# Altium PCB UU-PCBA-MANT-CON-AA.PcbDoc
Units mm, origin at the board's own origin, x right, y up, seen from the top; angles counter-clockwise.
Board outline 64 x 61 mm, 2 copper layers (Top Layer, Bottom Layer), stack 3.118 mm thick; 2 components, 3 nets, 13 pads, 0 vias.
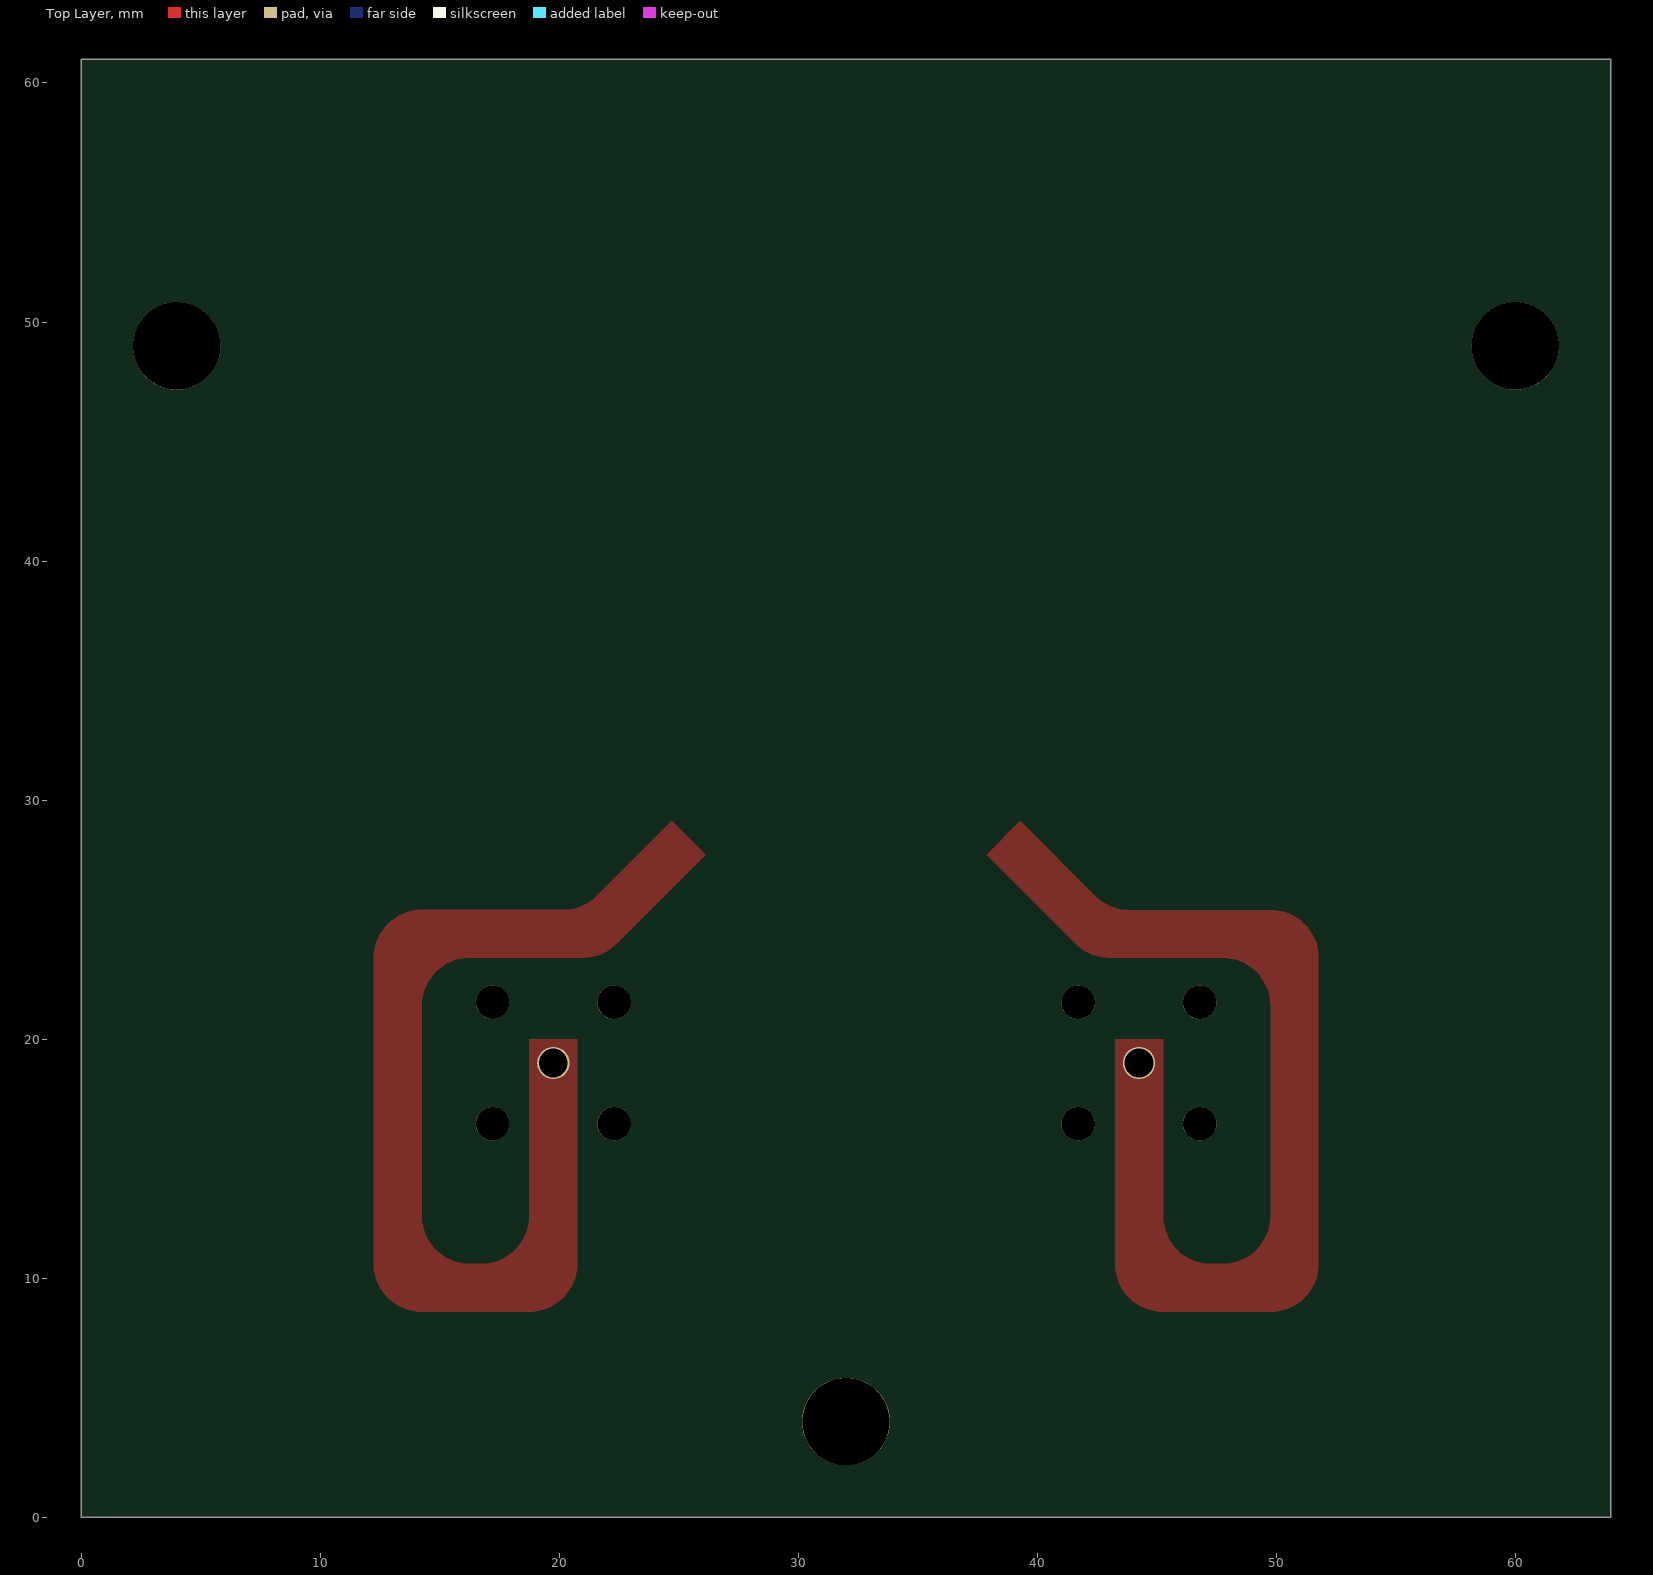
[diagram p0: Top Layer view]
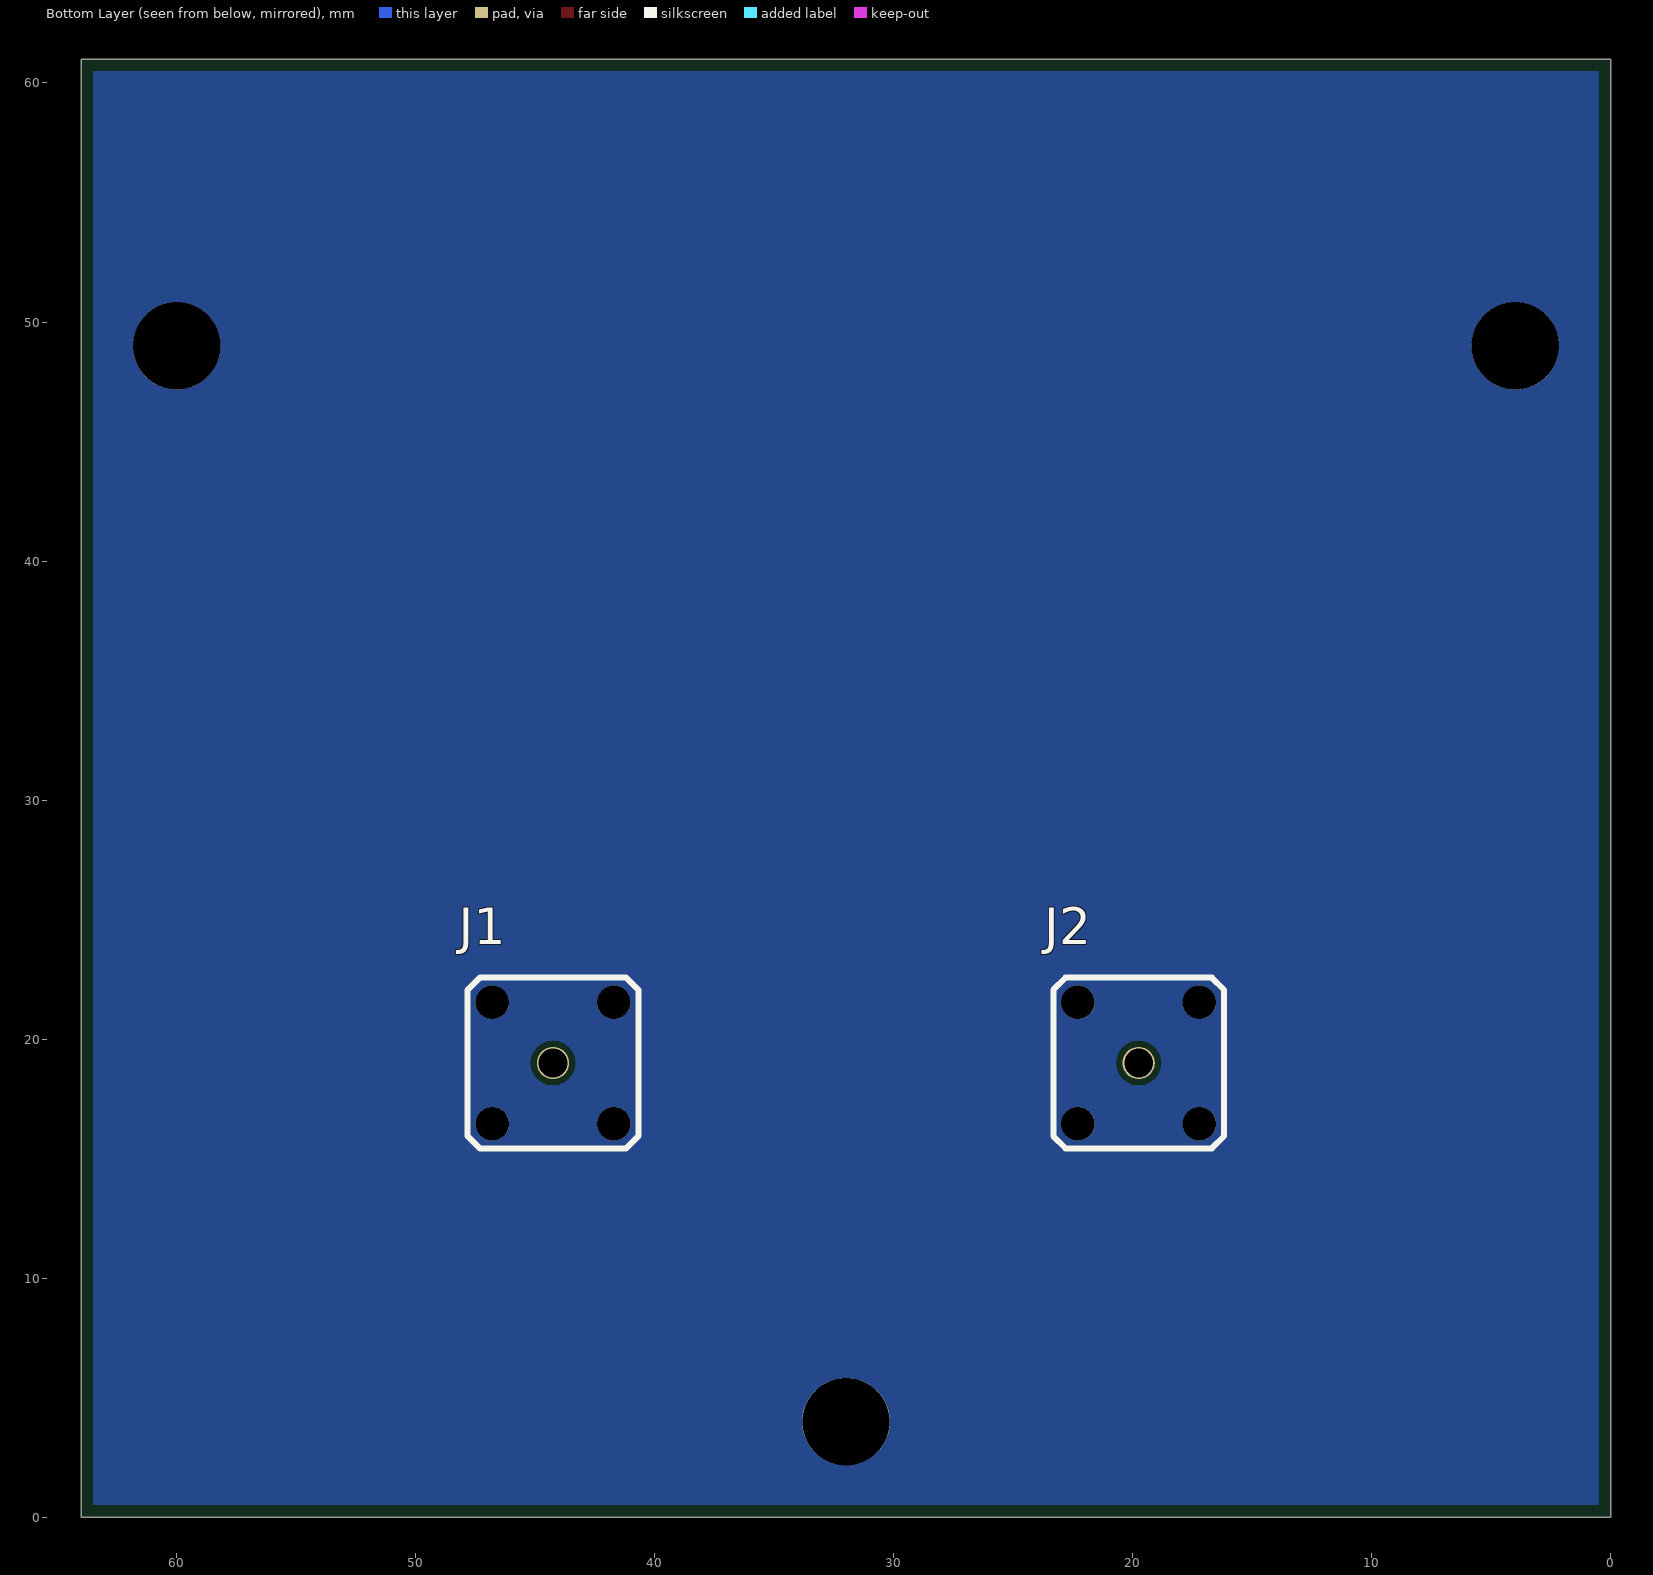
[diagram p1: Bottom Layer view, seen from below]

## Layer stack, top to bottom
Top Solder: solder mask 0.0254, Solder Resist, Dk 4
Top Layer: signal copper 0.035
Dielectric 1: core 3.048, Rogers AD300D, Dk 3
Bottom Layer: signal copper 0.035
Bottom Solder: solder mask 0.0254, Solder Resist, Dk 4

## Board outline
0,0 64,0 64,61 0,61

## Design rules (kind name [scope] priority, off if disabled: settings)
BoardOutlineClearance [All] p1: gap=0.508 ignorepadtopadclearanceinfootprint=FALSE
Clearance [All] p1: gap=0.254 ignorepadtopadclearanceinfootprint=FALSE except(0: Arc-Hole Track-Hole SMDPad-Hole THPad-Hole Via-Hole Fill-Hole Poly-Hole Region-Hole Text-Hole)
ComponentClearance [All] p1: gap=0 collisioncheckmode=3 verticalgap=0 showdistances=FALSE
PlaneConnect [All] p1: planeconnectstyle=Direct reliefexpansion=0.508 reliefentries=4 reliefconductorwidth=0.254 reliefairgap=0.254
PolygonConnect [All] p1: connectstyle=Direct reliefconductorwidth=0.4 reliefentries=4 polygonreliefangle="45 Angle" airgapwidth=0.3
RoutingVias [All] p1: holewidth=0.711 width=1.27 viastyle="Through Hole" minholewidth=0.711 minwidth=1.27 maxholewidth=0.711 maxwidth=1.27
SolderMaskExpansion [All] p1: expansion=0.102 istentingtop=FALSE
Width [All] p1: maxlimit=30 minlimit=0.01 preferedwidth=1.1 minimp=50.000000 maximp=50.000000 favimp=50.000000
28 further rules are at their usual default settings.

## Components (designator, comment, footprint, x,y, rotation, side; value= is the part's Value field where it differs from the comment)
J1 "MCX Male" RSP-199156-01 44.256,19 r180 bottom
J2 "MCX Male" RSP-199156-01 19.756,19 r180 bottom

## Footprints (in the part's own frame and the unit in brackets; to place one, negate y for a bottom-side part, rotate by r counter-clockwise, add the part's x,y. Pads: shape width x height; smd on the part's side, far side on the other; paste and mask are expansions set on the pad)
RSP-199156-01 [mm] "Samtec MODIFIED 50 OHM MCX JACK PLUG, THROUGH-HOLE"
  round 1.4 hole 1.4 paste+0 mask-5: 0(-2.54,-2.54) 0(2.54,-2.54)
  round 1.4 hole 1.4 unplated paste+0 mask-5: 0(-2.54,2.54) 0(2.54,2.54)
  round 1.35 hole 1.2 paste+0 mask-5: 1(0,0)
  silkscreen extent -3.57,-3.57 3.57,3.57, body extent -3,-3 3,3, height 8.42

## Part data
J1 J2: library part RSP-199156-01, "Samtec MODIFIED 50 OHM MCX JACK PLUG, THROUGH-HOLE"

## Free pads (board coordinates)
  round 3.66 hole 3.66 unplated: 0(4,49) 0(32,4) 0(60,49)

## Nets (pads, with @x,y where several pads share a name; then routed paths per layer and width w, separated by ;. In a path a pad name is that pad's centre, name@x,y a point inside that pad or via, vN(x,y) a via of type N, cw(c..) or ccw(c..) an arc to the next point about the centre after c; other vN are vias at no path point)
ANT1: J1.1
ANT2: J2.1
GND: J1.0 J2.0 pad.0

## Polygon pours and split planes (outlines as drawn)
GND on Bottom Layer "Bottom Layer-GND" (solid, pour order 0): 0,64 0,0 64,0 64,64
ANT1 on Top Layer "ANT1_L01_P020" (solid, pour order 20): 51.176,9.184 cw(c49.762,10.598) 49.762,8.598 45.262,8.598 cw(c45.262,10.598) 43.847,9.184 cw(c45.262,10.598) 43.262,10.598 43.262,19.998 45.262,19.998 45.262,12.598 ccw(c47.262,12.598) 45.847,11.184 ccw(c47.262,12.598) 47.262,10.598 47.762,10.598 ccw(c47.762,12.598) 49.176,11.184 ccw(c47.762,12.598) 49.762,12.598 49.762,21.401 ccw(c47.762,21.401) 49.176,22.816 ccw(c47.762,21.401) 47.762,23.401 43.022,23.401 cw(c43.022,25.401) 42.257,23.554 cw(c43.022,25.401) 41.608,23.987 37.881,27.715 39.295,29.129 42.437,25.987 ccw(c43.851,27.401) 43.086,25.554 ccw(c43.851,27.401) 43.851,25.401 49.762,25.401 cw(c49.762,23.401) 51.176,24.816 cw(c49.762,23.401) 51.762,23.401 51.762,10.598 cw(c49.762,10.598)
ANT2 on Top Layer "ANT2_L01_P019" (solid, pour order 19): 12.836,9.186 ccw(c14.25,10.6) 14.25,8.6 18.75,8.6 ccw(c18.75,10.6) 20.164,9.186 ccw(c18.75,10.6) 20.75,10.6 20.75,20 18.75,20 18.75,12.6 cw(c16.75,12.6) 18.164,11.186 cw(c16.75,12.6) 16.75,10.6 16.25,10.6 cw(c16.25,12.6) 14.836,11.186 cw(c16.25,12.6) 14.25,12.6 14.25,21.403 cw(c16.25,21.403) 14.836,22.818 cw(c16.25,21.403) 16.25,23.403 20.989,23.403 ccw(c20.989,25.403) 21.755,23.556 ccw(c20.989,25.403) 22.403,23.989 26.131,27.717 24.717,29.131 21.575,25.989 cw(c20.161,27.403) 20.926,25.556 cw(c20.161,27.403) 20.161,25.403 14.25,25.403 ccw(c14.25,23.403) 12.836,24.818 ccw(c14.25,23.403) 12.25,23.403 12.25,10.6 ccw(c14.25,10.6)
no net on Top Layer "Top Layer-No Net 4" (solid, pour order 12): 32,36
no net on Top Layer "Top Layer-No Net" (solid, pour order 6): 0,15.05
no net on Top Layer "Top Layer-No Net 1" (solid, pour order 4): 0,0
no net on Top Layer "Top Layer-No Net 2" (solid, pour order 2): 0,0
no net on Top Solder (solid): 0,61 64,61 64,0.006 63.994,0 0,0

## Silkscreen, mask and mechanical layers (free items; w line width, h text height)
Top Solder:
  rectangle: 0,0 64,0.693
  region: 0.699,0 0.699,61 0.006,61 0.006,0
  region: 63.997,0 63.997,61 63.304,61 63.304,0
  rectangle: 0,60.307 64,61
  pour cut-out: 18.956,19.001 ccw(c19.756,19.001) 19.756,18.201 ccw(c19.756,19.001) 20.556,19.001 ccw(c19.756,19.001) 19.756,19.801 ccw(c19.756,19.001)
  pour cut-out: 43.456,18.998 ccw(c44.256,18.998) 44.256,18.198 ccw(c44.256,18.998) 45.056,18.998 ccw(c44.256,18.998) 44.256,19.798 ccw(c44.256,18.998)
  pour cut-out: 19.726,19.001 ccw(c19.756,19.001) 19.756,18.971 ccw(c19.756,19.001) 19.786,19.001 ccw(c19.756,19.001) 19.756,19.031 ccw(c19.756,19.001)
  region: 0,61 64,61
Bottom Solder:
  circle w2.3: c46.796,21.539 r0.001
  circle w2.3: c41.716,21.539 r0.001
  circle w1.55: c44.256,18.999 r0.001
  circle w1.8: c41.716,16.459 r0.001
  circle w1.8: c46.796,16.459 r0.001
  circle w1.8: c22.296,16.46 r0.001
  circle w1.8: c17.216,16.46 r0.001
  circle w1.55: c19.756,19 r0.001
  circle w2.3: c17.216,21.54 r0.001
  circle w2.3: c22.296,21.54 r0.001
SIG-Outline:
  the board outline again, w0.127
Mechanical 3:
  circle w0.013: c32,42.836 r15.4
  circle w0.013: c44.256,19.006 r0.45
  circle w0.013: c44.256,19.006 r0.485
  circle w0.013: c46.801,16.461 r0.665
  circle w0.013: c46.801,16.461 r0.7
  circle w0.013: c22.301,16.461 r0.665
  circle w0.013: c22.301,16.461 r0.7
  circle w0.013: c19.756,19.006 r0.45
  circle w0.013: c19.756,19.006 r0.485
  circle w0.013: c41.711,16.461 r0.665
  circle w0.013: c41.711,16.461 r0.7
  circle w0.013: c17.211,16.461 r0.665
  circle w0.013: c17.211,16.461 r0.7
  circle w0.013: c44.256,19.006 r0.485
  circle w0.013: c19.756,19.006 r0.485
  circle w0.013: c22.301,21.551 r0.7
  circle w0.013: c17.211,21.551 r0.7
  circle w0.013: c46.801,21.551 r0.7
  circle w0.013: c41.711,21.551 r0.7
  circle w0.013: c22.301,16.461 r0.7
  circle w0.013: c17.211,16.461 r0.7
  circle w0.013: c46.801,16.461 r0.7
  circle w0.013: c41.711,16.461 r0.7
  lines w0.013: 0.006,0.006 0.006,61 64.006,61 64.006,0.006 0.006,0.006 ; 17.495,41.234 ccw(c32.006,42.836) 18.739,36.741 ccw(c32.006,42.836) 21.337,32.87 21.995,33.484 cw(c32.006,42.836) 19.754,36.707 cw(c32.006,42.836) 18.519,40.434 19.208,40.557 ccw(c32.006,42.836) 22.814,33.644 ccw(c32.006,42.836) 29.727,30.038 29.604,29.349 cw(c32.006,42.836) 25.877,30.584 cw(c32.006,42.836) 22.654,32.825 22.04,32.167 ccw(c32.006,42.836) 25.911,29.569 ccw(c32.006,42.836) 30.404,28.325 30.679,30.809 cw(c32.006,42.836) 23.45,34.28 cw(c32.006,42.836) 19.979,41.509 17.495,41.234 ; 17.495,44.438 cw(c32.006,42.836) 18.739,48.931 cw(c32.006,42.836) 21.337,52.803 21.995,52.188 ccw(c32.006,42.836) 19.754,48.965 ccw(c32.006,42.836) 18.519,45.239 19.208,45.116 cw(c32.006,42.836) 22.814,52.029 cw(c32.006,42.836) 29.727,55.635 29.604,56.324 ccw(c32.006,42.836) 25.877,55.089 ccw(c32.006,42.836) 22.654,52.848 22.04,53.505 cw(c32.006,42.836) 25.911,56.103 cw(c32.006,42.836) 30.404,57.348 30.679,54.863 ccw(c32.006,42.836) 23.45,51.392 ccw(c32.006,42.836) 19.979,44.164 17.495,44.438 ; 33.334,30.809 ccw(c32.006,42.836) 40.562,34.28 ccw(c32.006,42.836) 44.033,41.509 46.518,41.234 cw(c32.006,42.836) 45.273,36.741 cw(c32.006,42.836) 42.675,32.87 42.018,33.484 ccw(c32.006,42.836) 44.259,36.707 ccw(c32.006,42.836) 45.494,40.434 44.805,40.557 cw(c32.006,42.836) 41.199,33.644 cw(c32.006,42.836) 34.286,30.038 34.409,29.349 ccw(c32.006,42.836) 38.135,30.584 ccw(c32.006,42.836) 41.358,32.825 41.973,32.167 cw(c32.006,42.836) 38.101,29.569 cw(c32.006,42.836) 33.608,28.325 33.334,30.809 ; 33.334,54.863 cw(c32.006,42.836) 40.562,51.392 cw(c32.006,42.836) 44.033,44.164 46.518,44.438 ccw(c32.006,42.836) 45.273,48.931 ccw(c32.006,42.836) 42.675,52.803 42.018,52.188 cw(c32.006,42.836) 44.259,48.965 cw(c32.006,42.836) 45.494,45.239 44.805,45.116 ccw(c32.006,42.836) 41.199,52.029 ccw(c32.006,42.836) 34.286,55.635 34.409,56.324 cw(c32.006,42.836) 38.135,55.089 cw(c32.006,42.836) 41.358,52.848 41.973,53.505 ccw(c32.006,42.836) 38.101,56.103 ccw(c32.006,42.836) 33.608,57.348 33.334,54.863
Mechanical 4:
  circle w0.013: c19.756,19.006 r0.485
  circle w0.013: c44.256,19.006 r0.485
  circle w0.013: c44.256,19.006 r0.45
  circle w0.013: c19.756,19.006 r0.485
  circle w0.013: c19.756,19.006 r0.45
  circle w0.013: c46.801,16.461 r0.7
  circle w0.013: c46.801,16.461 r0.665
  circle w0.013: c41.711,16.461 r0.7
  circle w0.013: c41.711,16.461 r0.665
  circle w0.013: c22.301,16.461 r0.7
  circle w0.013: c22.301,16.461 r0.665
  circle w0.013: c17.211,16.461 r0.7
  circle w0.013: c17.211,16.461 r0.665
  circle w0.013: c44.256,19.006 r0.485
  circle w0.013: c19.756,19.006 r0.485
  circle w0.013: c22.301,21.551 r0.7
  circle w0.013: c17.211,21.551 r0.7
  circle w0.013: c46.801,21.551 r0.7
  circle w0.013: c41.711,21.551 r0.7
  circle w0.013: c22.301,16.461 r0.7
  circle w0.013: c17.211,16.461 r0.7
  circle w0.013: c46.801,16.461 r0.7
  circle w0.013: c41.711,16.461 r0.7
  circle w0.013: c44.256,19.006 r0.485
  lines w0.013: 0.006,0.006 0.006,61 64.006,61 64.006,0.006 0.006,0.006 ; 13.106,25.406 19.106,25.406 19.106,20.556 18.506,20.556 18.506,19.556 19.106,19.556 19.106,18.406 20.406,18.406 20.406,29.489 cw(c22.406,29.489) 20.559,30.254 cw(c22.406,29.489) 20.992,30.903 28.506,38.417 27.587,39.336 19.692,31.441 ccw(c21.106,30.027) 19.259,30.793 ccw(c21.106,30.027) 19.106,30.027 19.106,26.506 13.106,26.506 13.106,25.406 ; 35.507,38.417 43.021,30.903 cw(c41.606,29.489) 43.454,30.254 cw(c41.606,29.489) 43.606,29.489 43.606,18.406 44.906,18.406 44.906,19.556 45.506,19.556 45.506,20.556 44.906,20.556 44.906,25.406 50.906,25.406 50.906,26.506 44.906,26.506 44.906,30.027 ccw(c42.906,30.027) 44.754,30.793 ccw(c42.906,30.027) 44.321,31.441 36.426,39.336 35.507,38.417
2020-2-24_patch:
  circle w0.013: c32.006,35.006 r15.6
  lines w0.013: 17.436,32.712 ccw(c32.006,35.006) 18.718,28.604 ccw(c32.006,35.006) 21.132,25.041 21.795,25.649 cw(c32.006,35.006) 19.789,28.483 cw(c32.006,35.006) 18.55,31.726 19.765,32.022 ccw(c32.006,35.006) 23.097,26.097 ccw(c32.006,35.006) 29.022,22.765 28.726,21.55 cw(c32.006,35.006) 25.483,22.789 cw(c32.006,35.006) 22.649,24.795 22.041,24.132 ccw(c32.006,35.006) 25.604,21.718 ccw(c32.006,35.006) 29.712,20.436 30.186,23.449 cw(c32.006,35.006) 23.733,26.733 cw(c32.006,35.006) 20.449,33.186 17.436,32.712 ; 17.436,37.301 cw(c32.006,35.006) 18.718,41.409 cw(c32.006,35.006) 21.132,44.971 21.795,44.363 ccw(c32.006,35.006) 19.789,41.53 ccw(c32.006,35.006) 18.55,38.287 19.765,37.991 cw(c32.006,35.006) 23.097,43.916 cw(c32.006,35.006) 29.022,47.248 28.726,48.462 ccw(c32.006,35.006) 25.483,47.224 ccw(c32.006,35.006) 22.649,45.218 22.041,45.881 cw(c32.006,35.006) 25.604,48.294 cw(c32.006,35.006) 29.712,49.577 30.186,46.564 ccw(c32.006,35.006) 23.733,43.279 ccw(c32.006,35.006) 20.449,36.827 17.436,37.301 ; 33.827,23.449 ccw(c32.006,35.006) 40.279,26.733 ccw(c32.006,35.006) 43.564,33.186 46.577,32.712 cw(c32.006,35.006) 45.294,28.604 cw(c32.006,35.006) 42.881,25.041 42.218,25.649 ccw(c32.006,35.006) 44.224,28.483 ccw(c32.006,35.006) 45.462,31.726 44.248,32.022 cw(c32.006,35.006) 40.916,26.097 cw(c32.006,35.006) 34.991,22.765 35.287,21.55 ccw(c32.006,35.006) 38.53,22.789 ccw(c32.006,35.006) 41.363,24.795 41.971,24.132 cw(c32.006,35.006) 38.409,21.718 cw(c32.006,35.006) 34.301,20.436 33.827,23.449 ; 33.827,46.564 cw(c32.006,35.006) 40.279,43.28 cw(c32.006,35.006) 43.564,36.827 46.577,37.301 ccw(c32.006,35.006) 45.294,41.409 ccw(c32.006,35.006) 42.881,44.971 42.218,44.363 cw(c32.006,35.006) 44.224,41.53 cw(c32.006,35.006) 45.462,38.287 44.248,37.991 ccw(c32.006,35.006) 40.916,43.916 ccw(c32.006,35.006) 34.991,47.248 35.287,48.462 cw(c32.006,35.006) 38.53,47.224 cw(c32.006,35.006) 41.363,45.218 41.971,45.881 ccw(c32.006,35.006) 38.409,48.294 ccw(c32.006,35.006) 34.301,49.577 33.827,46.564
2020-2-24_feed:
  circle w0.013: c44.25,19 r0.45
  circle w0.013: c44.25,19 r0.485
  circle w0.013: c19.75,19 r0.45
  circle w0.013: c19.75,19 r0.485
  lines w0.013: 12.25,10.6 ccw(c14.25,10.6) 12.836,9.186 ccw(c14.25,10.6) 14.25,8.6 18.75,8.6 ccw(c18.75,10.6) 20.164,9.186 ccw(c18.75,10.6) 20.75,10.6 20.75,20 18.75,20 18.75,12.6 cw(c16.75,12.6) 18.164,11.186 cw(c16.75,12.6) 16.75,10.6 16.25,10.6 cw(c16.25,12.6) 14.836,11.186 cw(c16.25,12.6) 14.25,12.6 14.25,21.403 cw(c16.25,21.403) 14.836,22.818 cw(c16.25,21.403) 16.25,23.403 20.989,23.403 ccw(c20.989,25.403) 21.755,23.556 ccw(c20.989,25.403) 22.403,23.989 26.131,27.717 24.717,29.131 21.575,25.989 cw(c20.161,27.403) 20.926,25.556 cw(c20.161,27.403) 20.161,25.403 14.25,25.403 ccw(c14.25,23.403) 12.836,24.818 ccw(c14.25,23.403) 12.25,23.403 12.25,10.6 ; 37.869,27.717 39.283,29.131 42.425,25.989 ccw(c43.839,27.403) 43.074,25.556 ccw(c43.839,27.403) 43.839,25.403 49.75,25.403 cw(c49.75,23.403) 51.164,24.818 cw(c49.75,23.403) 51.75,23.403 51.75,10.6 cw(c49.75,10.6) 51.164,9.186 cw(c49.75,10.6) 49.75,8.6 45.25,8.6 cw(c45.25,10.6) 43.836,9.186 cw(c45.25,10.6) 43.25,10.6 43.25,20 45.25,20 45.25,12.6 ccw(c47.25,12.6) 45.836,11.186 ccw(c47.25,12.6) 47.25,10.6 47.75,10.6 ccw(c47.75,12.6) 49.164,11.186 ccw(c47.75,12.6) 49.75,12.6 49.75,21.403 ccw(c47.75,21.403) 49.164,22.818 ccw(c47.75,21.403) 47.75,23.403 43.011,23.403 cw(c43.011,25.403) 42.245,23.556 cw(c43.011,25.403) 41.597,23.989 37.869,27.717
2020-2-24_gnd:
  circle w0.013: c44.25,19 r1
  circle w0.013: c19.75,19 r1
  circle w0.013: c46.795,21.545 r0.7
  circle w0.013: c41.705,21.545 r0.7
  circle w0.013: c46.795,16.455 r0.7
  circle w0.013: c41.705,16.455 r0.7
  circle w0.013: c17.205,21.545 r0.7
  circle w0.013: c22.295,21.545 r0.7
  circle w0.013: c17.205,16.455 r0.7
  circle w0.013: c22.295,16.455 r0.7
  circle w0.013: c44.25,19 r0.45
  circle w0.013: c44.25,19 r0.485
  circle w0.013: c19.75,19 r0.45
  circle w0.013: c19.75,19 r0.485
  circle w0.013: c46.795,16.455 r0.665
  circle w0.013: c46.795,16.455 r0.7
  circle w0.013: c41.705,16.455 r0.665
  circle w0.013: c41.705,16.455 r0.7
  circle w0.013: c17.205,16.455 r0.665
  circle w0.013: c17.205,16.455 r0.7
  circle w0.013: c22.295,16.455 r0.665
  circle w0.013: c22.295,16.455 r0.7
  lines w0.013: 0.508,0.508 63.492,0.508 63.492,60.492 0.508,60.492 0.508,0.508